# Altium PCB PCB1.PcbDoc (part 2 of 2)
Units mil, origin at the board's own origin, x right, y up, seen from the top; angles counter-clockwise.
Board outline 6000 x 4000 mil, 2 copper layers (Top Layer, Bottom Layer); 176 components, 0 nets, 932 pads, 76 vias.
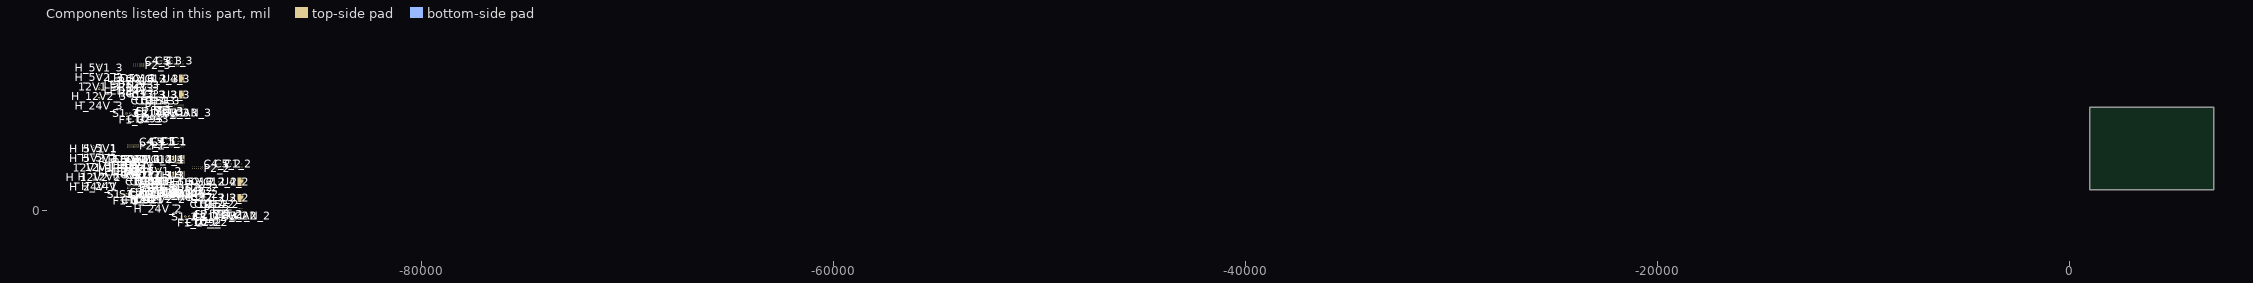
[diagram p2: the components of this part, seen from the top]

## Via types
v1: diameter 60, hole 35.43, Top Layer to Bottom Layer, 68 vias
v2: diameter 60, hole 28, Top Layer to Bottom Layer, 4 vias
v3: diameter 50, hole 28, Top Layer to Bottom Layer, 4 vias

## Nets (pads, with @x,y where several pads share a name; then routed paths per layer and width w, separated by ;. In a path a pad name is that pad's centre, name@x,y a point inside that pad or via, vN(x,y) a via of type N, cw(c..) or ccw(c..) an arc to the next point about the centre after c; other vN are vias at no path point) (continued)
copper on no net: | length 466920.3
  Top Layer w20: v1(-92504,3457.5) -92504,3250.33 -92484.47,3230.8 -92484.47,3039.53 -92544,2980 -92544,2800.82 -92509,2765.82 -92454.82,2765.82 v2(-92449,2760) -91606.43,2760 -91494,2647.57 -91494,740 -91599,635 -91877.28,635 -91889,646.72 -91889,707.76 ; v1(-92454,2860) -91664,2860 -91459,2655 -91459,730 -91584,605 -91999,605 -92039,645 -92039,707.76 ; v1(-92229,7382.5) -92229,7175.33 -92209.47,7155.8 -92209.47,6964.53 -92269,6905 -92269,6725.82 -92234,6690.82 -92179.82,6690.82 v2(-92174,6685) -91331.43,6685 -91219,6572.57 -91219,4665 -91324,4560 -91602.28,4560 -91614,4571.72 -91614,4632.76 ; v1(-92214,3467.5) -92214,3260.33 -92194.47,3240.8 -92194.47,3049.53 -92254,2990 -92254,2810.82 -92219,2775.82 -92164.82,2775.82 v2(-92159,2770) -91316.43,2770 -91204,2657.57 -91204,750 -91309,645 -91587.28,645 -91599,656.72 -91599,717.76 ; v1(-92179,6785) -91389,6785 -91184,6580 -91184,4655 -91309,4530 -91724,4530 -91764,4570 -91764,4632.76 ; v1(-92164,2870) -91374,2870 -91169,2665 -91169,740 -91294,615 -91709,615 -91749,655 -91749,717.76 ; -91989,926.69 -91989,988.5 -91962.5,1015 -91865.76,1015 -91756.61,905.85 -91756.61,865.85 -91742.99,852.23 -91741.39,852.23 -91737.51,856.11 -91617.89,856.11 -91614,860 ; -91939,902.24 -91939,973.28 -91927.28,985 -91878.19,985 -91844,950.81 -91844,810 -91811.43,777.43 -91741.39,777.43 -91732.68,768.71 -91622.71,768.71 -91614,760 -91636.57,737.43 ; -91714,4851.69 -91714,4913.5 -91687.5,4940 -91590.76,4940 -91481.61,4830.85 -91481.61,4790.85 -91467.99,4777.23 -91466.39,4777.23 -91462.51,4781.11 -91342.89,4781.11 -91339,4785 ; -91699,936.69 -91699,998.5 -91672.5,1025 -91575.76,1025 -91466.61,915.85 -91466.61,875.85 -91452.99,862.23 -91451.39,862.23 -91447.51,866.11 -91327.89,866.11 -91324,870 ; -91664,4827.24 -91664,4898.28 -91652.28,4910 -91603.19,4910 -91569,4875.81 -91569,4735 -91536.43,4702.43 -91466.39,4702.43 -91457.68,4693.71 -91347.71,4693.71 -91339,4685 -91361.57,4662.43 ; -91649,912.24 -91649,983.28 -91637.28,995 -91588.19,995 -91554,960.81 -91554,820 -91521.43,787.43 -91451.39,787.43 -91442.68,778.71 -91332.71,778.71 -91324,770 -91346.57,747.43 ; v1(-89369,2372.5) -89369,2165.33 -89349.47,2145.8 -89349.47,1954.53 -89409,1895 -89409,1715.82 -89374,1680.82 -89319.82,1680.82 v2(-89314,1675) -88471.43,1675 -88359,1562.57 -88359,-345 -88464,-450 -88742.28,-450 -88754,-438.28 -88754,-377.24 ; v1(-89319,1775) -88529,1775 -88324,1570 -88324,-355 -88449,-480 -88864,-480 -88904,-440 -88904,-377.24 ; -88854,-158.31 -88854,-96.5 -88827.5,-70 -88730.76,-70 -88621.61,-179.15 -88621.61,-219.15 -88607.99,-232.77 -88606.39,-232.77 -88602.51,-228.89 -88482.89,-228.89 -88479,-225 ; -88804,-182.76 -88804,-111.72 -88792.28,-100 -88743.19,-100 -88709,-134.19 -88709,-275 -88676.43,-307.57 -88606.39,-307.57 -88597.68,-316.29 -88487.71,-316.29 -88479,-325 -88501.57,-347.57
  Top Layer w25: v1(-94359,295) -95544,295 -96144,895 -96144,2990 -95894,3240 -95189,3240 -94869,2920 -92808.64,2920 -92749,2860.36 -92749,2764.29 -92749,2466 -92750,2465 ; -94322.23,1732.61 -94322.23,1799.27 -94296.5,1825 -94294,1825 ; -94294,1915 -94589.36,1915 -94604,1929.64 -94604,2565 -94346.5,2822.5 -94219,2822.5 ; -94289,2430 -94276.5,2417.5 -94258.64,2417.5 -94244,2402.86 -94244,2335.17 -94251.77,2327.39 ; -94285,2192.5 -94283.75,2191.25 -93996.27,2191.25 -93995.02,2190 ; -94284,2120 -94281.5,2120 -94254,2092.5 -94254,2024.62 ; v1(-94084,4220) -95269,4220 -95869,4820 -95869,6915 -95619,7165 -94914,7165 -94594,6845 -92533.64,6845 -92474,6785.36 -92474,6689.29 -92474,6391 -92475,6390 ; v1(-94069,305) -95254,305 -95854,905 -95854,3000 -95604,3250 -94899,3250 -94579,2930 -92518.64,2930 -92459,2870.36 -92459,2774.29 -92459,2476 -92460,2475 ; -94047.23,5657.61 -94047.23,5724.27 -94021.5,5750 -94019,5750 ; -94032.23,1742.61 -94032.23,1809.27 -94006.5,1835 -94004,1835 ; -94019,5840 -94314.36,5840 -94329,5854.64 -94329,6490 -94071.5,6747.5 -93944,6747.5 ; -94014,1711 -94010,1715 ; -94014,6355 -94001.5,6342.5 -93983.64,6342.5 -93969,6327.86 -93969,6260.17 -93976.77,6252.39 ; -94010,6117.5 -94008.75,6116.25 -93721.27,6116.25 -93720.02,6115 ; -94009,6045 -94006.5,6045 -93979,6017.5 -93979,5949.62 ; -94004,1925 -94299.36,1925 -94314,1939.64 -94314,2575 -94056.5,2832.5 v1@-93929,2832.5 ; -93999,2440 -93986.5,2427.5 -93968.64,2427.5 -93954,2412.86 -93954,2345.17 -93961.77,2337.39 ; -93995,2202.5 -93993.75,2201.25 -93706.27,2201.25 -93705.02,2200 ; -93994,2130 -93991.5,2130 -93964,2102.5 -93964,2034.62 ; -93990.02,2005 -93995.02,2010 -93995.02,2075 ; v1(-93946.5,2822.5) -93889,2765 -93889,2280.27 -93979.27,2190 -93995.02,2190 ; -93829.98,2005 -93830.04,2004.94 -93830.04,1752.63 -93810,1732.59 -93810,1715 -93808.66,1713.66 -93808.66,1619.66 -93749,1560 -93549,1560 -93439,1670 -93439,1820.36 -93424.36,1835 -93079,1835 -92881.5,2032.5 -92518.64,2032.5 -92504,2017.86 -92504,1764.64 -92489.36,1750 -92360,1750 ; -93810,2455 -93810,2436.06 -93834.98,2411.07 -93834.98,2190 -92894,2190 -92554,2530 -92360,2530 ; -93739,5636 -93735,5640 ; -93724,1721 -93720,1725 ; -93715.02,5930 -93720.02,5935 -93720.02,6000 ; -93700.02,2015 -93705.02,2020 -93705.02,2085 ; v1(-93671.5,6747.5) -93614,6690 -93614,6205.27 -93704.27,6115 -93720.02,6115 ; v1(-93656.5,2832.5) -93599,2775 -93599,2290.27 -93689.27,2200 -93705.02,2200 ; -93554.98,5930 -93555.04,5929.94 -93555.04,5677.63 -93535,5657.59 -93535,5640 -93533.66,5638.66 -93533.66,5544.66 -93474,5485 -93274,5485 -93164,5595 -93164,5745.36 -93149.36,5760 -92804,5760 -92606.5,5957.5 -92243.64,5957.5 -92229,5942.86 -92229,5689.64 -92214.36,5675 -92085,5675 ; -93539.98,2015 -93540.04,2014.94 -93540.04,1762.63 -93520,1742.59 -93520,1725 -93518.66,1723.66 -93518.66,1629.66 -93459,1570 -93259,1570 -93149,1680 -93149,1830.36 -93134.36,1845 -92789,1845 -92591.5,2042.5 -92228.64,2042.5 -92214,2027.86 -92214,1774.64 -92199.36,1760 -92070,1760 ; -93536.01,1690 -93536.01,1825.52 -93785.49,2075 -93995.02,2075 ; -93535,6380 -93535,6361.06 -93559.98,6336.07 -93559.98,6115 -92619,6115 -92279,6455 -92085,6455 ; -93533.51,2465 -93408.51,2590 -93059.39,2590 -92950,2480.61 -92950,2465 ; -93520,2465 -93520,2446.06 -93544.98,2421.07 -93544.98,2200 -92604,2200 -92264,2540 -92070,2540 ; -93333.51,2465 -93333.51,2364.51 -93284,2315 -92900,2315 -92750,2465 ; -93261.01,5615 -93261.01,5750.52 -93510.49,6000 -93720.02,6000 ; -93258.51,6390 -93133.51,6515 -92784.39,6515 -92675,6405.61 -92675,6390 ; -93257.77,1385.13 -93257.77,1381.2 -93244.15,1367.57 -93240.21,1367.57 -93142.64,1270 -92760.72,1270 -92749,1281.72 -92749,1383.91 -92737.91,1395 -92339,1395 -92179,1555 -92179,1885 ; -93246.01,1700 -93246.01,1835.52 -93495.49,2085 -93705.02,2085 ; -93243.51,2475 -93118.51,2600 -92769.39,2600 -92660,2490.61 -92660,2475 ; -93058.51,6390 -93058.51,6289.51 -93009,6240 -92625,6240 -92475,6390 ; -93043.51,2475 -93043.51,2374.51 -92994,2325 -92610,2325 -92460,2475 ; -92989.12,1680.88 -93052.57,1617.43 -93052.57,1385.13 -93052.57,1330.04 -93037.54,1315 -92843.64,1315 -92829,1329.64 -92829,1378.71 -92822.57,1385.13 ; -92982.77,5310.13 -92982.77,5306.2 -92969.15,5292.57 -92965.21,5292.57 -92867.64,5195 -92485.72,5195 -92474,5206.72 -92474,5308.91 -92462.91,5320 -92064,5320 -91904,5480 -91904,5810 ; -92980,1690 -92980,1869 -92851.5,1997.5 -92558.64,1997.5 -92544,1982.86 -92544,1699.64 -92529.36,1685 -92365,1685 -92360,1680 -92319.69,1680 -92294.82,1655.14 -92293.63,1655.14 -92264,1625.5 -92264,1555 -92278.64,1540.36 -92359.64,1540.36 -92360,1540 ; -92967.77,1395.13 -92967.77,1391.2 -92954.15,1377.57 -92950.21,1377.57 -92852.64,1280 -92470.72,1280 -92459,1291.72 -92459,1393.91 -92447.91,1405 -92049,1405 -91889,1565 -91889,1895 ; -92714.12,5605.88 -92777.57,5542.43 -92777.57,5310.13 -92777.57,5255.04 -92762.54,5240 -92568.64,5240 -92554,5254.64 -92554,5303.71 -92547.57,5310.13 ; -92705,5615 -92705,5794 -92576.5,5922.5 -92283.64,5922.5 -92269,5907.86 -92269,5624.64 -92254.36,5610 -92090,5610 -92085,5605 -92044.69,5605 -92019.82,5580.14 -92018.63,5580.14 -91989,5550.5 -91989,5480 -92003.64,5465.36 -92084.64,5465.36 -92085,5465 ; -92699.12,1690.88 -92762.57,1627.43 -92762.57,1395.13 -92762.57,1340.04 -92747.54,1325 -92553.64,1325 -92539,1339.64 -92539,1388.71 -92532.57,1395.13 ; -92690,1700 -92690,1879 -92561.5,2007.5 -92268.64,2007.5 -92254,1992.86 -92254,1709.64 -92239.36,1695 -92075,1695 -92070,1690 -92029.69,1690 -92004.82,1665.14 -92003.63,1665.14 -91974,1635.5 -91974,1565 -91988.64,1550.36 -92069.64,1550.36 -92070,1550 ; -92360,1820 -92244,1820 -92179,1885 ; -92360,2320 -92274,2320 -92234,2360 -92234,2415 -92271.81,2452.81 -92352.81,2452.81 -92360,2460 ; -92123.87,777.77 -92121.64,780 -91954.33,780 -91939.69,765.36 -91939.69,708.45 -91939,707.76 ; -92123.87,852.57 -92119.59,856.85 -92058.81,856.85 -92039,876.65 -92039,902.24 ; -92085,5745 -91969,5745 -91904,5810 ; -92085,6245 -91999,6245 -91959,6285 -91959,6340 -91996.81,6377.81 -92077.81,6377.81 -92085,6385 ; -92070,1830 -91954,1830 -91889,1895 ; -92070,2330 -91984,2330 -91944,2370 -91944,2425 -91981.81,2462.81 -92062.81,2462.81 -92070,2470 ; -91848.87,4702.77 -91846.64,4705 -91679.33,4705 -91664.69,4690.36 -91664.69,4633.44 -91664,4632.76 ; -91848.87,4777.57 -91844.59,4781.85 -91783.81,4781.85 -91764,4801.65 -91764,4827.24 ; -91833.87,787.77 -91831.64,790 -91664.33,790 -91649.69,775.36 -91649.69,718.45 -91649,717.76 ; -91833.87,862.57 -91829.59,866.85 -91768.81,866.85 -91749,886.65 -91749,912.24 ; v1(-91224,-790) -92409,-790 -93009,-190 -93009,1905 -92759,2155 -92054,2155 -91734,1835 -89673.64,1835 -89614,1775.36 -89614,1679.29 -89614,1381 -89615,1380 ; -91187.23,647.61 -91187.23,714.27 -91161.5,740 -91159,740 ; -91159,830 -91454.36,830 -91469,844.64 -91469,1480 -91211.5,1737.5 -91084,1737.5 ; -91154,1345 -91141.5,1332.5 -91123.64,1332.5 -91109,1317.86 -91109,1250.17 -91116.77,1242.39 ; -91150,1107.5 -91148.75,1106.25 -90861.27,1106.25 -90860.02,1105 ; -91149,1035 -91146.5,1035 -91119,1007.5 -91119,939.62 ; -90879,626 -90875,630 ; -90855.02,920 -90860.02,925 -90860.02,990 ; v1(-90811.5,1737.5) -90754,1680 -90754,1195.27 -90844.27,1105 -90860.02,1105 ; -90694.98,920 -90695.04,919.94 -90695.04,667.63 -90675,647.59 -90675,630 -90673.66,628.66 -90673.66,534.66 -90614,475 -90414,475 -90304,585 -90304,735.36 -90289.36,750 -89944,750 -89746.5,947.5 -89383.64,947.5 -89369,932.86 -89369,679.64 -89354.36,665 -89225,665 ; -90675,1370 -90675,1351.06 -90699.98,1326.07 -90699.98,1105 -89759,1105 -89419,1445 -89225,1445 ; -90401.01,605 -90401.01,740.52 -90650.49,990 -90860.02,990 ; -90398.51,1380 -90273.51,1505 -89924.39,1505 -89815,1395.61 -89815,1380 ; -90198.51,1380 -90198.51,1279.51 -90149,1230 -89765,1230 -89615,1380 ; -90122.77,300.13 -90122.77,296.2 -90109.15,282.57 -90105.21,282.57 -90007.64,185 -89625.72,185 -89614,196.72 -89614,298.91 -89602.91,310 -89204,310 -89044,470 -89044,800 ; -89854.12,595.88 -89917.57,532.43 -89917.57,300.13 -89917.57,245.04 -89902.54,230 -89708.64,230 -89694,244.64 -89694,293.71 -89687.57,300.13 ; -89845,605 -89845,784 -89716.5,912.5 -89423.64,912.5 -89409,897.86 -89409,614.64 -89394.36,600 -89230,600 -89225,595 -89184.69,595 -89159.82,570.14 -89158.63,570.14 -89129,540.5 -89129,470 -89143.64,455.36 -89224.64,455.36 -89225,455 ; -89225,735 -89109,735 -89044,800 ; -89225,1235 -89139,1235 -89099,1275 -89099,1330 -89136.81,1367.81 -89217.81,1367.81 -89225,1375 ; -88988.87,-307.23 -88986.64,-305 -88819.33,-305 -88804.69,-319.64 -88804.69,-376.56 -88804,-377.24 ; -88988.87,-232.43 -88984.59,-228.15 -88923.81,-228.15 -88904,-208.35 -88904,-182.76 ; -93995.02,2075 -93995.02,2190 ; -93720.02,6000 -93720.02,6115 ; -93705.02,2085 -93705.02,2200 ; -92750,2465 -92615,2600 -92360,2600 -92229,2600 -92179,2550 -92179,1885 ; -92475,6390 -92340,6525 -92085,6525 -91954,6525 -91904,6475 -91904,5810 ; -92460,2475 -92325,2610 -92070,2610 -91939,2610 -91889,2560 -91889,1895 ; -90860.02,990 -90860.02,1105 ; -89615,1380 -89480,1515 -89225,1515 -89094,1515 -89044,1465 -89044,800
  Top Layer w35: v1(-95294,2790) -95884,2790 -96084,2590 -96084,955 -95744,615 v1(-95379,615) v1(-92789,615) -92290.57,615 -92133.93,771.65 -92129.99,771.65 -92123.87,777.77 ; v1(-95019,6715) -95609,6715 -95809,6515 -95809,4880 -95469,4540 v1(-95104,4540) v1(-92514,4540) -92015.57,4540 -91858.93,4696.65 -91854.99,4696.65 -91848.87,4702.77 ; v1(-95004,2800) -95594,2800 -95794,2600 -95794,965 -95454,625 v1(-95089,625) v1(-92499,625) -92000.57,625 -91843.93,781.65 -91839.99,781.65 -91833.87,787.77 ; v1(-94409,2605) -94409,2413.76 -94332.7,2337.45 -94332.7,2333.52 -94326.57,2327.39 ; -94289,2520 -94286.5,2520 -94279,2527.5 -94279,2530 -94109,2700 -94109,2822.5 ; -94247.43,1732.61 -94247.43,1640.21 -94404,1483.64 -94404,1016.36 -94067.64,680 v1(-93919,680) ; -94219,2822.5 -94109,2822.5 ; v1(-94134,6530) -94134,6338.76 -94057.7,6262.45 -94057.7,6258.52 -94051.57,6252.39 ; v1(-94119,2615) -94119,2423.76 -94042.7,2347.45 -94042.7,2343.52 -94036.57,2337.39 ; -94014,1711 -94007,1704 -94007,1508 v1(-94004,1505) ; -94014,6445 -94011.5,6445 -94004,6452.5 -94004,6455 -93834,6625 -93834,6747.5 ; v1(-94004,2755) -94007,2752 -94007,2372 -94109,2270 -94343.5,2270 -94364,2249.5 -94364,2108.61 -94327.7,2072.31 -94327.7,2039.58 -94297.89,2009.78 -94297.89,1998.44 -94267.04,1967.59 -94241.2,1967.59 -94159,1885.39 -94159,1390 ; -93999,2530 -93996.5,2530 -93989,2537.5 -93989,2540 -93819,2710 -93819,2832.5 ; -93972.43,5657.61 -93972.43,5565.21 -94129,5408.64 -94129,4941.36 -93792.64,4605 v1(-93644,4605) ; -93957.43,1742.61 -93957.43,1650.21 -94114,1493.64 -94114,1026.36 -93777.64,690 v1(-93629,690) ; v1(-93946.5,2822.5) -94109,2822.5 ; -93944,6747.5 -93834,6747.5 ; v1@-93929,2832.5 -93819,2832.5 ; v1(-93824,765) -94074,765 -94339,1030 -94339,1369.5 -94318.5,1390 -94159,1390 ; -93739,5636 -93732,5629 -93732,5433 v1(-93729,5430) ; v1(-93729,6680) -93732,6677 -93732,6297 -93834,6195 -94068.5,6195 -94089,6174.5 -94089,6033.61 -94052.7,5997.31 -94052.7,5964.58 -94022.89,5934.78 -94022.89,5923.44 -93992.04,5892.59 -93966.2,5892.59 -93884,5810.39 -93884,5315 ; -93724,1721 -93717,1714 -93717,1518 v1(-93714,1515) ; v1(-93714,2765) -93717,2762 -93717,2382 -93819,2280 -94053.5,2280 -94074,2259.5 -94074,2118.61 -94037.7,2082.31 -94037.7,2049.58 -94007.89,2019.78 -94007.89,2008.44 -93977.04,1977.59 -93951.2,1977.59 -93869,1895.39 -93869,1400 ; v1(-93671.5,6747.5) -93834,6747.5 ; v1(-93656.5,2832.5) -93819,2832.5 ; v1(-93549,4690) -93799,4690 -94064,4955 -94064,5294.5 -94043.5,5315 -93884,5315 ; -93536.01,1825.52 -93536.01,1827.99 -93474,1890 -93109,1890 -92539,2460 -92360,2460 ; v1(-93534,775) -93784,775 -94049,1040 -94049,1379.5 -94028.5,1400 -93869,1400 ; -93481.43,1384.87 -93481.29,1385 -93332.71,1385 -93332.57,1385.13 -93326.45,1391.26 -93326.45,1467.55 -93113.12,1680.88 -92989.12,1680.88 -92980,1690 ; -93336.01,1690 -93556.23,1469.78 -93556.23,1384.87 -93561.36,1390 -94159,1390 ; -93261.01,5750.52 -93261.01,5752.99 -93199,5815 -92834,5815 -92264,6385 -92085,6385 ; -93246.01,1835.52 -93246.01,1837.99 -93184,1900 -92819,1900 -92249,2470 -92070,2470 ; -93206.43,5309.87 -93206.29,5310 -93057.71,5310 -93057.57,5310.13 -93051.45,5316.26 -93051.45,5392.55 -92838.12,5605.88 -92714.12,5605.88 -92705,5615 ; -93191.43,1394.87 -93191.29,1395 -93042.71,1395 -93042.57,1395.13 -93036.45,1401.26 -93036.45,1477.55 -92823.12,1690.88 -92699.12,1690.88 -92690,1700 ; -93061.01,5615 -93281.23,5394.78 -93281.23,5309.87 -93286.36,5315 -93884,5315 ; -93046.01,1700 -93266.23,1479.78 -93266.23,1394.87 -93271.36,1400 -93869,1400 ; -92977.77,1385.13 -92971.65,1391.26 -92971.65,1397.35 -92780,1589 -92780,1690 -92763.54,1706.46 -92763.54,1760.46 v1(-92604,1920) ; v3(-92816.01,3462.5) -92816.01,3462.99 -92761.5,3517.5 -91851.5,3517.5 -91394,3060 -91394,565 -91554,405 -92444,405 v1(-92544,505) ; -92702.77,5310.13 -92696.65,5316.26 -92696.65,5322.35 -92505,5514 -92505,5615 -92488.54,5631.46 -92488.54,5685.46 v1(-92329,5845) ; -92687.77,1395.13 -92681.65,1401.26 -92681.65,1407.35 -92490,1599 -92490,1700 -92473.54,1716.46 -92473.54,1770.46 v1(-92314,1930) ; v1(-92674,2125) -92669.22,2129.78 -92669.22,2194.78 -92474,2390 -92360,2390 ; v1@-92604,1911.14 -92604,1695 -92519,1610 -92360,1610 ; v1(-92549,720) -92304,720 -92175.36,848.64 -92127.8,848.64 -92123.87,852.57 ; v3(-92541.01,7387.5) -92541.01,7387.99 -92486.5,7442.5 -91576.5,7442.5 -91119,6985 -91119,4490 -91279,4330 -92169,4330 v1(-92269,4430) ; v3(-92526.01,3472.5) -92526.01,3472.99 -92471.5,3527.5 -91561.5,3527.5 -91104,3070 -91104,575 -91264,415 -92154,415 v1(-92254,515) ; v1(-92399,6050) -92394.22,6054.78 -92394.22,6119.78 -92199,6315 -92085,6315 ; v1(-92384,2135) -92379.22,2139.78 -92379.22,2204.78 -92184,2400 -92070,2400 ; v1@-92329,5836.14 -92329,5620 -92244,5535 -92085,5535 ; v1@-92314,1921.14 -92314,1705 -92229,1620 -92070,1620 ; v1(-92274,4645) -92029,4645 -91900.36,4773.64 -91852.8,4773.64 -91848.87,4777.57 ; v1(-92259,730) -92014,730 -91885.36,858.64 -91837.8,858.64 -91833.87,862.57 ; v1(-92159,1705) -92749,1705 -92949,1505 -92949,-130 -92609,-470 v1(-92244,-470) v1(-89654,-470) -89155.57,-470 -88998.93,-313.35 -88994.99,-313.35 -88988.87,-307.23 ; -91900,1685 -91900,1744.06 ; -91900,2465 -91900,1744.06 ; v1(-91644,2150) -91641.13,2147.13 -91641.13,2073.07 -91640.67,2072.61 -91640.67,2003.38 -91900,1744.06 ; -91625,5610 -91625,5669.06 ; -91625,6390 -91625,5669.06 ; -91610,1695 -91610,1754.06 ; -91610,2475 -91610,1754.06 ; v1(-91369,6075) -91366.13,6072.13 -91366.13,5998.07 -91365.67,5997.61 -91365.67,5928.38 -91625,5669.06 ; v1(-91354,2160) -91351.13,2157.13 -91351.13,2083.07 -91350.67,2082.61 -91350.67,2013.38 -91610,1754.06 ; v1(-91274,1520) -91274,1328.76 -91197.7,1252.45 -91197.7,1248.52 -91191.57,1242.39 ; -91154,1435 -91151.5,1435 -91144,1442.5 -91144,1445 -90974,1615 -90974,1737.5 ; -91112.43,647.61 -91112.43,555.21 -91269,398.64 -91269,-68.64 -90932.64,-405 v1(-90784,-405) ; -91084,1737.5 -90974,1737.5 ; -90879,626 -90872,619 -90872,423 v1(-90869,420) ; v1(-90869,1670) -90872,1667 -90872,1287 -90974,1185 -91208.5,1185 -91229,1164.5 -91229,1023.61 -91192.7,987.31 -91192.7,954.58 -91162.89,924.78 -91162.89,913.44 -91132.04,882.59 -91106.2,882.59 -91024,800.39 -91024,305 ; v1(-90811.5,1737.5) -90974,1737.5 ; v1(-90689,-320) -90939,-320 -91204,-55 -91204,284.5 -91183.5,305 -91024,305 ; -90401.01,740.52 -90401.01,742.99 -90339,805 -89974,805 -89404,1375 -89225,1375 ; -90346.43,299.87 -90346.29,300 -90197.71,300 -90197.57,300.13 -90191.45,306.26 -90191.45,382.55 -89978.12,595.88 -89854.12,595.88 -89845,605 ; -90201.01,605 -90421.23,384.78 -90421.23,299.87 -90426.36,305 -91024,305 ; -89842.77,300.13 -89836.65,306.26 -89836.65,312.35 -89645,504 -89645,605 -89628.54,621.46 -89628.54,675.46 v1(-89469,835) ; v3(-89681.01,2377.5) -89681.01,2377.99 -89626.5,2432.5 -88716.5,2432.5 -88259,1975 -88259,-520 -88419,-680 -89309,-680 v1(-89409,-580) ; v1(-89539,1040) -89534.22,1044.78 -89534.22,1109.78 -89339,1305 -89225,1305 ; v1@-89469,826.14 -89469,610 -89384,525 -89225,525 ; v1(-89414,-365) -89169,-365 -89040.36,-236.36 -88992.8,-236.36 -88988.87,-232.43 ; -88765,600 -88765,659.06 ; -88765,1380 -88765,659.06 ; v1(-88509,1065) -88506.13,1062.13 -88506.13,988.07 -88505.67,987.61 -88505.67,918.38 -88765,659.06
  Bottom Layer w20: -93734,1070 -93723.43,1070 -93708.84,1055.41 -93704.41,1055.41 -93529,880 ; -93734,1170 -93659,1245 -93509,1245 -93484,1220 -93484,935 -93429,880 ; -93698.87,542.23 -93571.77,542.23 -93555,559 -93555,611.3 ; -93605,611.3 -93605,640.29 -93591.23,654.06 -93591.23,755.13 ; v1@-93516.43,755.13 -93516.43,651.72 -93505,640.29 -93505,611.3 ; -93459,4995 -93448.43,4995 -93433.84,4980.41 -93429.41,4980.41 -93254,4805 ; -93459,5095 -93384,5170 -93234,5170 -93209,5145 -93209,4860 -93154,4805 ; -93455,611.3 -93455,582.76 -93340.02,467.77 -93144.13,467.77 ; -93444,1080 -93433.43,1080 -93418.84,1065.41 -93414.41,1065.41 -93239,890 ; -93444,1180 -93369,1255 -93219,1255 -93194,1230 -93194,945 -93139,890 ; -93423.87,4467.23 -93296.77,4467.23 -93280,4484 -93280,4536.3 ; -93408.87,552.23 -93281.77,552.23 -93265,569 -93265,621.3 ; -93405,398.7 -93404.46,398.16 -93404.46,369.62 -93322.34,287.5 -91841.5,287.5 -91499,630 -91499,3255 -91734,3490 -91889,3490 -92049,3330 -91984.47,3265.47 -91984.47,3120.47 -91934,3070 ; -93405,611.3 -93405,582.76 -93364.82,542.57 -93144.13,542.57 ; -93355,398.7 -93355,370.16 -93304.84,320 -91884,320 -91534,670 -91534,3225 -91764,3455 -91864,3455 -91946.63,3372.37 -91946.63,3332.37 -91949,3330 -91949,3319.22 -91934,3304.22 -91934,3170 ; -93355,611.3 -93355,680.67 -93320.39,715.28 -93320.39,741.24 -93306.77,754.87 ; -93330,4536.3 -93330,4565.29 -93316.23,4579.06 -93316.23,4680.13 ; -93315,621.3 -93315,650.29 -93301.23,664.06 -93301.23,765.13 ; -93305,611.3 -93305,669 -93094,880 ; -93255,611.3 -93255,674 -93172.73,756.27 -93047.73,756.27 -92994,810 -92994,880 ; -93241.43,4680.13 -93241.43,4576.72 -93230,4565.29 -93230,4536.3 ; -93226.43,765.13 -93226.43,661.72 -93215,650.29 -93215,621.3 ; -93180,4536.3 -93180,4507.76 -93065.02,4392.77 -92869.13,4392.77 ; -93165,621.3 -93165,592.76 -93050.02,477.77 -92854.13,477.77 ; -93159,3330 -93159,3246.62 -93183.53,3222.09 -93183.53,3119.53 -93134,3070 ; -93134,3170 -93126.5,3170 -92966.5,3330 -92959,3330 ; -93130,4323.7 -93129.46,4323.16 -93129.46,4294.62 -93047.34,4212.5 -91566.5,4212.5 -91224,4555 -91224,7180 -91459,7415 -91614,7415 -91774,7255 -91709.47,7190.47 -91709.47,7045.47 -91659,6995 ; -93130,4536.3 -93130,4507.76 -93089.82,4467.57 -92869.13,4467.57 ; -93115,408.7 -93114.46,408.16 -93114.46,379.62 -93032.34,297.5 -91551.5,297.5 -91209,640 -91209,3265 -91444,3500 -91599,3500 -91759,3340 -91694.47,3275.47 -91694.47,3130.47 -91644,3080 ; -93115,621.3 -93115,592.76 -93074.82,552.57 -92854.13,552.57 ; -93080,4323.7 -93080,4295.16 -93029.84,4245 -91609,4245 -91259,4595 -91259,7150 -91489,7380 -91589,7380 -91671.63,7297.37 -91671.63,7257.37 -91674,7255 -91674,7244.22 -91659,7229.22 -91659,7095 ; -93080,4536.3 -93080,4605.67 -93045.39,4640.28 -93045.39,4666.24 -93031.77,4679.87 ; -93065,408.7 -93065,380.16 -93014.84,330 -91594,330 -91244,680 -91244,3235 -91474,3465 -91574,3465 -91656.63,3382.37 -91656.63,3342.37 -91659,3340 -91659,3329.22 -91644,3314.22 -91644,3180 ; -93065,621.3 -93065,690.67 -93030.39,725.28 -93030.39,751.24 -93016.77,764.87 ; -93034,3070 -93034,2795 -92949,2710 -92428.29,2710 -92383.53,2754.76 -92383.53,3293.84 -92354.01,3323.36 -92354.01,3330 ; -93030,4536.3 -93030,4594 -92819,4805 ; -93015,621.3 -93015,679 -92804,890 ; -92980,4536.3 -92980,4599 -92897.73,4681.27 -92772.73,4681.27 -92719,4735 -92719,4805 ; -92965,621.3 -92965,684 -92882.73,766.27 -92757.73,766.27 -92704,820 -92704,890 ; -92884,7255 -92884,7171.62 -92908.53,7147.09 -92908.53,7044.53 -92859,6995 ; -92869,3340 -92869,3256.62 -92893.53,3232.09 -92893.53,3129.53 -92844,3080 ; -92859,7095 -92851.5,7095 -92691.5,7255 -92684,7255 ; -92844,3180 -92836.5,3180 -92676.5,3340 -92669,3340 ; -92759,6995 -92759,6720 -92674,6635 -92153.29,6635 -92108.53,6679.76 -92108.53,7218.84 -92079.01,7248.36 -92079.01,7255 ; -92744,3080 -92744,2805 -92659,2720 -92138.29,2720 -92093.53,2764.76 -92093.53,3303.84 -92064.01,3333.36 -92064.01,3340 ; -92634,1170 -92583.53,1119.53 -92583.53,1049.48 -92463.96,929.92 -92397.25,929.92 -92385.54,918.21 -92385.54,886.54 -92379,880 ; -92634,3070 -92634,2905 -92589,2860 v1(-92454,2860) ; -92534,1070 -92439.08,975.08 -92374.08,975.08 -92279,880 ; -92534,3170 -92534,3279.41 -92503.93,3309.48 -92503.93,3457.43 v1(-92504,3457.5) ; -92359,5095 -92308.53,5044.53 -92308.53,4974.48 -92188.96,4854.92 -92122.25,4854.92 -92110.54,4843.21 -92110.54,4811.54 -92104,4805 ; -92359,6995 -92359,6830 -92314,6785 v1(-92179,6785) ; -92344,1180 -92293.53,1129.53 -92293.53,1059.48 -92173.96,939.92 -92107.25,939.92 -92095.54,928.21 -92095.54,896.54 -92089,890 ; -92344,3080 -92344,2915 -92299,2870 v1(-92164,2870) ; -92259,4995 -92164.08,4900.08 -92099.08,4900.08 -92004,4805 ; -92259,7095 -92259,7204.41 -92228.93,7234.48 -92228.93,7382.43 v1(-92229,7382.5) ; -92244,1080 -92149.08,985.08 -92084.08,985.08 -91989,890 ; -92244,3180 -92244,3289.41 -92213.93,3319.48 -92213.93,3467.43 v1(-92214,3467.5) ; -90599,-15 -90588.43,-15 -90573.84,-29.59 -90569.41,-29.59 -90394,-205 ; -90599,85 -90524,160 -90374,160 -90349,135 -90349,-150 -90294,-205 ; -90563.87,-542.77 -90436.77,-542.77 -90420,-526 -90420,-473.7 ; -90470,-473.7 -90470,-444.71 -90456.23,-430.94 -90456.23,-329.87 ; -90381.43,-329.87 -90381.43,-433.28 -90370,-444.71 -90370,-473.7 ; -90320,-473.7 -90320,-502.24 -90205.02,-617.23 -90009.13,-617.23 ; -90270,-686.3 -90269.46,-686.84 -90269.46,-715.38 -90187.34,-797.5 -88706.5,-797.5 -88364,-455 -88364,2170 -88599,2405 -88754,2405 -88914,2245 -88849.47,2180.47 -88849.47,2035.47 -88799,1985 ; -90270,-473.7 -90270,-502.24 -90229.82,-542.43 -90009.13,-542.43 ; -90220,-686.3 -90220,-714.84 -90169.84,-765 -88749,-765 -88399,-415 -88399,2140 -88629,2370 -88729,2370 -88811.63,2287.37 -88811.63,2247.37 -88814,2245 -88814,2234.22 -88799,2219.22 -88799,2085 ; -90220,-473.7 -90220,-404.33 -90185.39,-369.72 -90185.39,-343.76 -90171.77,-330.13 ; -90170,-473.7 -90170,-416 -89959,-205 ; -90120,-473.7 -90120,-411 -90037.73,-328.73 -89912.73,-328.73 -89859,-275 -89859,-205 ; -90024,2245 -90024,2161.62 -90048.53,2137.09 -90048.53,2034.53 -89999,1985 ; -89999,2085 -89991.5,2085 -89831.5,2245 -89824,2245 ; -89899,1985 -89899,1710 -89814,1625 -89293.29,1625 -89248.53,1669.76 -89248.53,2208.84 -89219.01,2238.36 -89219.01,2245 ; -89499,85 -89448.53,34.53 -89448.53,-35.52 -89328.96,-155.08 -89262.25,-155.08 -89250.54,-166.79 -89250.54,-198.46 -89244,-205 ; -89499,1985 -89499,1820 -89454,1775 v1(-89319,1775) ; -89399,-15 -89304.08,-109.92 -89239.08,-109.92 -89144,-205 ; -89399,2085 -89399,2194.41 -89368.93,2224.48 -89368.93,2372.43 v1(-89369,2372.5)
  Bottom Layer w25: -94729,465 -94529,465 -94529,460 -94364,295 v1(-94359,295) ; -94454,4390 -94254,4390 -94254,4385 -94089,4220 v1(-94084,4220) ; -94439,475 -94239,475 -94239,470 -94074,305 v1(-94069,305) ; -93698.87,467.43 -93468.64,467.43 -93454,452.78 -93454,399.7 -93455,398.7 ; -93423.87,4392.43 -93193.64,4392.43 -93179,4377.78 -93179,4324.7 -93180,4323.7 ; -93408.87,477.43 -93178.64,477.43 -93164,462.78 -93164,409.7 -93165,408.7 ; -93134,1070 -93039.08,975.08 -92989.08,975.08 -92894,880 ; -93034,3170 -92954.08,3249.92 -92634.08,3249.92 -92554.01,3330 ; -92859,3330 -92654.01,3330 ; -92859,4995 -92764.08,4900.08 -92714.08,4900.08 -92619,4805 ; -92844,1080 -92749.08,985.08 -92699.08,985.08 -92604,890 ; -92759,7095 -92679.08,7174.92 -92359.08,7174.92 -92279.01,7255 ; -92744,3180 -92664.08,3259.92 -92344.08,3259.92 -92264.01,3340 ; -92584,7255 -92379.01,7255 ; -92569,3340 -92364.01,3340 ; v1@-92535.41,713.59 -92345.41,713.59 -92089,970 -91854,970 -91834,990 -91834,1070 ; v1@-92260.41,4638.59 -92070.41,4638.59 -91814,4895 -91579,4895 -91559,4915 -91559,4995 ; v1@-92245.41,723.59 -92055.41,723.59 -91799,980 -91564,980 -91544,1000 -91544,1080 ; -91849,3330 -91849,3320.57 -91834,3305.57 -91834,3170 ; -91594,-620 -91394,-620 -91394,-625 -91229,-790 v1(-91224,-790) ; -91574,7255 -91574,7245.57 -91559,7230.57 -91559,7095 ; -91559,3340 -91559,3330.57 -91544,3315.57 -91544,3180 ; -90563.87,-617.57 -90333.64,-617.57 -90319,-632.22 -90319,-685.3 -90320,-686.3 ; -89999,-15 -89904.08,-109.92 -89854.08,-109.92 -89759,-205 ; -89899,2085 -89819.08,2164.92 -89499.08,2164.92 -89419.01,2245 ; -89724,2245 -89519.01,2245 ; v1@-89400.41,-371.41 -89210.41,-371.41 -88954,-115 -88719,-115 -88699,-95 -88699,-15 ; -88714,2245 -88714,2235.57 -88699,2220.57 -88699,2085
  Bottom Layer w35: -96149,1745 -96149,2240 -96149,2830 -95894,3085 ; -96133.5,2240 -96016.25,2240 ; -95899,1708.75 -96112.75,1708.75 -96154,1750 -96154,1245 ; -95899,1967.5 -95739,1807.5 -95739,1668.75 -95862.75,1545 -95899,1508.75 -95895.25,1505 -94534,1505 ; -95899,2167.5 -95811.5,2167.5 -95739,2240 ; -95899,2480 -95604,2480 v1(-95294,2790) ; -95899,2626.25 -95919.29,2626.25 -95958.04,2587.5 -95991.5,2587.5 -96016.25,2562.75 -96016.25,2240 ; -95894,2885 -95389,2885 v1(-95294,2790) ; -95892.5,1050 -94349,1050 -94049,750 ; -95874,5670 -95874,6165 -95874,6755 -95619,7010 ; -95859,1755 -95859,2250 -95859,2840 -95604,3095 ; -95858.5,6165 -95741.25,6165 ; -95843.5,2250 -95726.25,2250 ; -95624,5633.75 -95837.75,5633.75 -95879,5675 -95879,5170 ; -95624,5892.5 -95464,5732.5 -95464,5593.75 -95587.75,5470 -95624,5433.75 -95620.25,5430 -94259,5430 ; -95624,6092.5 -95536.5,6092.5 -95464,6165 ; -95624,6405 -95329,6405 v1(-95019,6715) ; -95624,6551.25 -95644.29,6551.25 -95683.04,6512.5 -95716.5,6512.5 -95741.25,6487.75 -95741.25,6165 ; -95619,6810 -95114,6810 v1(-95019,6715) ; -95617.5,4975 -94074,4975 -93774,4675 ; -95609,1718.75 -95822.75,1718.75 -95864,1760 -95864,1255 ; -95609,1977.5 -95449,1817.5 -95449,1678.75 -95572.75,1555 -95609,1518.75 -95605.25,1515 -94244,1515 ; -95609,2177.5 -95521.5,2177.5 -95449,2250 ; -95609,2490 -95314,2490 v1(-95004,2800) ; -95609,2636.25 -95629.29,2636.25 -95668.04,2597.5 -95701.5,2597.5 -95726.25,2572.75 -95726.25,2250 ; -95604,2895 -95099,2895 v1(-95004,2800) ; -95602.5,1060 -94059,1060 -93759,760 ; v1(-95379,615) -95374.22,610.22 -95356.54,610.22 -95351.32,605 -94400.73,605 -94385.73,620 ; v1(-95104,4540) -95099.22,4535.22 -95081.54,4535.22 -95076.32,4530 -94125.73,4530 -94110.73,4545 ; v1(-95089,625) -95084.22,620.22 -95066.54,620.22 -95061.32,615 -94110.73,615 -94095.73,630 ; -94764.04,770 -96154,770 ; -94579,770 -94449,900 -94269,900 -94129,760 -94129,560 -94169,520 -94169,435.4 -94108.6,375 -93839,375 -93764,450 -93764,680 -93824,740 v1(-93824,765) ; -94489.04,4695 -95879,4695 ; -94474.04,780 -95864,780 ; v1(-94409,2605) -94534,2480 -94534,1505 ; -94393.96,770 -94385.73,761.77 -94385.73,620 ; -94304,4695 -94174,4825 -93994,4825 -93854,4685 -93854,4485 -93894,4445 -93894,4360.4 -93833.6,4300 -93564,4300 -93489,4375 -93489,4605 -93549,4665 v1(-93549,4690) ; -94289,780 -94159,910 -93979,910 -93839,770 -93839,570 -93879,530 -93879,445.4 -93818.6,385 -93549,385 -93474,460 -93474,690 -93534,750 v1(-93534,775) ; -94234,3170 -94234,3070 -94234,2865 ; -94134,1070 -94134,1170 ; -94134,3070 -94134,3170 -94134,3284.5 -94139.5,3290 -94794,3290 v1(-95294,2790) ; -94134,3280 -93999,3415 -93059,3415 ; v1(-94134,6530) -94259,6405 -94259,5430 ; v1(-94119,2615) -94244,2490 -94244,1515 ; -94118.96,4695 -94110.73,4686.77 -94110.73,4545 ; -94103.96,780 -94095.73,771.77 -94095.73,630 ; -94034,3070 -94034,3170 ; v1(-94004,2755) -93374,2125 v1(-92674,2125) ; -93959,7095 -93959,6995 -93959,6790 ; v1(-93946.5,2822.5) -94191.5,2822.5 -94234,2865 ; -93944,3180 -93944,3080 -93944,2875 ; v1(-93919,680) -93923.78,684.78 -93983.78,684.78 -94049,750 ; -93879,465 -94079,465 -94079,492.59 -94049,522.59 -94049,750 ; -93859,4995 -93859,5095 ; -93859,6995 -93859,7095 -93859,7209.5 -93864.5,7215 -94519,7215 v1(-95019,6715) ; -93859,7205 -93724,7340 -92784,7340 ; -93844,1080 -93844,1180 ; -93844,3080 -93844,3180 -93844,3294.5 -93849.5,3300 -94504,3300 v1(-95004,2800) ; -93844,3290 -93709,3425 -92769,3425 ; -93759,6995 -93759,7095 ; -93744,3080 -93744,3180 ; v1(-93729,6680) -93099,6050 v1(-92399,6050) ; v1(-93714,2765) -93084,2135 v1(-92384,2135) ; -93698.87,467.43 -93698.87,462.87 -93700.43,461.3 -93700.43,403.57 -93784,320 ; v1(-93671.5,6747.5) -93916.5,6747.5 -93959,6790 ; v1(-93656.5,2832.5) -93901.5,2832.5 -93944,2875 ; v1(-93644,4605) -93648.78,4609.78 -93708.78,4609.78 -93774,4675 ; v1(-93629,690) -93633.78,694.78 -93693.78,694.78 -93759,760 ; -93629,880 -93844,880 ; -93611.67,376.83 -93668.5,320 -93784,320 ; -93604,4390 -93804,4390 -93804,4417.59 -93774,4447.59 -93774,4675 ; -93589,475 -93789,475 -93789,502.59 -93759,532.59 -93759,760 ; -93555,398.7 -93555,321 -93544,310 ; -93505,398.7 -93505,349 -93544,310 ; -93423.87,4392.43 -93423.87,4387.87 -93425.43,4386.3 -93425.43,4328.57 -93509,4245 ; -93408.87,477.43 -93408.87,472.87 -93410.43,471.3 -93410.43,413.57 -93494,330 ; -93381.57,754.87 -93444.8,754.87 -93465.3,775.37 -93465.3,794.08 -93481.41,810.19 -93774.19,810.19 -93844,880 ; -93354,4805 -93569,4805 ; -93339,890 -93554,890 ; -93336.67,4301.83 -93393.5,4245 -93509,4245 ; -93321.67,386.83 -93378.5,330 -93494,330 ; -93280,4323.7 -93280,4246 -93269,4235 ; -93265,408.7 -93265,331 -93254,320 ; -93230,4323.7 -93230,4274 -93269,4235 ; -93215,408.7 -93215,359 -93254,320 ; -93106.57,4679.87 -93169.8,4679.87 -93190.3,4700.37 -93190.3,4719.08 -93206.41,4735.19 -93499.19,4735.19 -93569,4805 ; -93091.57,764.87 -93154.8,764.87 -93175.3,785.37 -93175.3,804.08 -93191.41,820.19 -93484.19,820.19 -93554,890 ; -93059,3330 -93059,3415 ; -93014,660 -93014,1155 -93014,1745 -92759,2000 ; -92998.5,1155 -92881.25,1155 ; -92980,1690 -92980,1702.9 -92958.8,1724.1 -92958.8,1731.51 -92697.82,1992.5 -92412.82,1992.5 -92367.82,1947.5 -91846.5,1947.5 v1(-91644,2150) -91644,2610 -91734,2700 ; -92950,2465 -92810,2605 -91829,2605 -91734,2700 ; -92894,880 -92892.28,880 -92834.86,937.42 -92537.69,937.42 -92480.27,880 -92479,880 -92479,790 v1(-92549,720) -92546.5,717.5 -92546.5,507.5 v1(-92544,505) ; -92859,3330 -92859,3415.45 -92816.01,3458.44 v3(-92816.01,3462.5) ; -92794,880 -92794,685.5 -92793.78,685.29 -92793.78,665.22 ; v1(-92789,615) -92793.78,619.78 -92793.78,665.22 ; -92784,7255 -92784,7340 ; -92769,3340 -92769,3425 ; v1@-92764,623.75 -92977.75,623.75 -93019,665 -93019,160 ; -92764,882.5 -92604,722.5 -92604,583.75 -92727.75,460 -92764,423.75 -92760.25,420 -91399,420 ; -92764,1082.5 -92676.5,1082.5 -92604,1155 ; -92764,1395 -92469,1395 v1(-92159,1705) ; -92764,1541.25 -92784.29,1541.25 -92823.04,1502.5 -92856.5,1502.5 -92881.25,1477.75 -92881.25,1155 ; -92759,1800 -92254,1800 v1(-92159,1705) ; -92757.5,-35 -91214,-35 -90914,-335 ; -92705,5615 -92705,5627.9 -92683.8,5649.1 -92683.8,5656.51 -92422.82,5917.5 -92137.82,5917.5 -92092.82,5872.5 -91571.5,5872.5 v1(-91369,6075) -91369,6535 -91459,6625 ; -92690,1700 -92690,1712.9 -92668.8,1734.1 -92668.8,1741.51 -92407.82,2002.5 -92122.82,2002.5 -92077.82,1957.5 -91556.5,1957.5 v1(-91354,2160) -91354,2620 -91444,2710 ; -92675,6390 -92535,6530 -91554,6530 -91459,6625 ; -92660,2475 -92520,2615 -91539,2615 -91444,2710 ; -92619,4805 -92617.28,4805 -92559.86,4862.42 -92262.69,4862.42 -92205.27,4805 -92204,4805 -92204,4715 v1(-92274,4645) -92271.5,4642.5 -92271.5,4432.5 v1(-92269,4430) ; -92604,890 -92602.28,890 -92544.86,947.42 -92247.69,947.42 -92190.27,890 -92189,890 -92189,800 v1(-92259,730) -92256.5,727.5 -92256.5,517.5 v1(-92254,515) ; v1(-92604,1920) -92604,1510 -92724,1390 -93983.5,1390 -94004,1410.5 v1(-94004,1505) -94534,1505 ; -92584,7255 -92584,7340.45 -92541.01,7383.44 v3(-92541.01,7387.5) ; -92579,880 -92793.78,665.22 ; -92569,3340 -92569,3425.45 -92526.01,3468.44 v3(-92526.01,3472.5) ; -92519,4805 -92519,4610.5 -92518.78,4610.29 -92518.78,4590.22 ; v1(-92514,4540) -92518.78,4544.78 -92518.78,4590.22 ; -92504,890 -92504,695.5 -92503.78,695.29 -92503.78,675.22 ; v1(-92499,625) -92503.78,629.78 -92503.78,675.22 ; -92454.01,3330 -92449.25,3334.75 -92449.25,3352.32 -92443.22,3358.35 -92443.22,3365.78 -92404,3405 -92161.42,3405 -92161.42,3342.42 -92149,3330 ; v1(-92329,5845) -92329,5435 -92449,5315 -93708.5,5315 -93729,5335.5 v1(-93729,5430) -94259,5430 ; v1(-92314,1930) -92314,1520 -92434,1400 -93693.5,1400 -93714,1420.5 v1(-93714,1515) -94244,1515 ; -92304,4805 -92518.78,4590.22 ; -92289,890 -92503.78,675.22 ; v1(-92244,-470) -92239.22,-474.78 -92221.54,-474.78 -92216.32,-480 -91265.73,-480 -91250.73,-465 ; -92179.01,7255 -92174.25,7259.75 -92174.25,7277.32 -92168.22,7283.35 -92168.22,7290.78 -92129,7330 -91886.42,7330 -91886.42,7267.42 -91874,7255 ; -92164.01,3340 -92159.25,3344.75 -92159.25,3362.32 -92153.22,3368.35 -92153.22,3375.78 -92114,3415 -91871.42,3415 -91871.42,3352.42 -91859,3340 ; -91834,1070 -91834,1170 ; -91834,3170 -91834,3070 -91734,2970 -91734,2700 ; -91629.04,-315 -93019,-315 ; -91559,4995 -91559,5095 ; -91559,7095 -91559,6995 -91459,6895 -91459,6625 ; -91544,1080 -91544,1180 ; -91544,3180 -91544,3080 -91444,2980 -91444,2710 ; -91444,-315 -91314,-185 -91134,-185 -90994,-325 -90994,-525 -91034,-565 -91034,-649.6 -90973.6,-710 -90704,-710 -90629,-635 -90629,-405 -90689,-345 v1(-90689,-320) ; v1(-91274,1520) -91399,1395 -91399,420 ; -91258.96,-315 -91250.73,-323.23 -91250.73,-465 ; -91099,2085 -91099,1985 -91099,1780 ; -90999,-15 -90999,85 ; -90999,1985 -90999,2085 -90999,2199.5 -91004.5,2205 -91659,2205 v1(-92159,1705) ; -90999,2195 -90864,2330 -89924,2330 ; -90899,1985 -90899,2085 ; v1(-90869,1670) -90239,1040 v1(-89539,1040) ; v1(-90811.5,1737.5) -91056.5,1737.5 -91099,1780 ; v1(-90784,-405) -90788.78,-400.22 -90848.78,-400.22 -90914,-335 ; -90744,-620 -90944,-620 -90944,-592.41 -90914,-562.41 -90914,-335 ; -90563.87,-617.57 -90563.87,-622.13 -90565.43,-623.7 -90565.43,-681.43 -90649,-765 ; -90494,-205 -90709,-205 ; -90476.67,-708.17 -90533.5,-765 -90649,-765 ; -90420,-686.3 -90420,-764 -90409,-775 ; -90370,-686.3 -90370,-736 -90409,-775 ; -90246.57,-330.13 -90309.8,-330.13 -90330.3,-309.63 -90330.3,-290.92 -90346.41,-274.81 -90639.19,-274.81 -90709,-205 ; -89924,2245 -89924,2330 ; -89845,605 -89845,617.9 -89823.8,639.1 -89823.8,646.51 -89562.82,907.5 -89277.82,907.5 -89232.82,862.5 -88711.5,862.5 v1(-88509,1065) -88509,1525 -88599,1615 ; -89815,1380 -89675,1520 -88694,1520 -88599,1615 ; -89759,-205 -89757.28,-205 -89699.86,-147.58 -89402.69,-147.58 -89345.27,-205 -89344,-205 -89344,-295 v1(-89414,-365) -89411.5,-367.5 -89411.5,-577.5 v1(-89409,-580) ; -89724,2245 -89724,2330.45 -89681.01,2373.44 v3(-89681.01,2377.5) ; -89659,-205 -89659,-399.5 -89658.78,-399.71 -89658.78,-419.78 ; v1(-89654,-470) -89658.78,-465.22 -89658.78,-419.78 ; v1(-89469,835) -89469,425 -89589,305 -90848.5,305 -90869,325.5 v1(-90869,420) -91399,420 ; -89444,-205 -89658.78,-419.78 ; -89319.01,2245 -89314.25,2249.75 -89314.25,2267.32 -89308.22,2273.35 -89308.22,2280.78 -89269,2320 -89026.42,2320 -89026.42,2257.42 -89014,2245 ; -88699,-15 -88699,85 ; -88699,2085 -88699,1985 -88599,1885 -88599,1615 ; -96154,770 -96154,1245 ; -96154,770 -95619,235 -93619,235 -93544,310 ; -96154,1245 -96149,1250 -95899,1250 -94314,1250 -94234,1170 -94234,1070 -94159,995 -94054.5,995 -94034,1015.5 -94034,1070 -93844,880 ; -96016.25,2240 -95739,2240 ; -95879,4695 -95879,5170 ; -95879,4695 -95344,4160 -93344,4160 -93269,4235 ; -95879,5170 -95874,5175 -95624,5175 -94039,5175 -93959,5095 -93959,4995 -93884,4920 -93779.5,4920 -93759,4940.5 -93759,4995 -93569,4805 ; -95864,780 -95864,1255 ; -95864,780 -95329,245 -93329,245 -93254,320 ; -95864,1255 -95859,1260 -95609,1260 -94024,1260 -93944,1180 -93944,1080 -93869,1005 -93764.5,1005 -93744,1025.5 -93744,1080 -93554,890 ; -95741.25,6165 -95464,6165 ; -95739,2240 -95494,2240 -94879,2855 -94244,2855 -94234,2865 ; -95726.25,2250 -95449,2250 ; -95464,6165 -95219,6165 -94604,6780 -93969,6780 -93959,6790 ; -95449,2250 -95204,2250 -94589,2865 -93954,2865 -93944,2875 ; -94385.73,620 -94385.73,605 -94385.73,553.09 -94152.64,320 -93784,320 ; -94110.73,4545 -94110.73,4530 -94110.73,4478.09 -93877.64,4245 -93509,4245 ; -94095.73,630 -94095.73,615 -94095.73,563.09 -93862.64,330 -93494,330 ; -93059,3415 -92959,3515 -92169.5,3515 -92149,3494.5 -92149,3405 -92149,3342.42 ; -93019,-315 -93019,160 ; -93019,-315 -92484,-850 -90484,-850 -90409,-775 ; -93019,160 -93014,165 -92764,165 -91179,165 -91099,85 -91099,-15 -91024,-90 -90919.5,-90 -90899,-69.5 -90899,-15 -90709,-205 ; -92881.25,1155 -92604,1155 ; -92784,7340 -92684,7440 -91894.5,7440 -91874,7419.5 -91874,7330 -91874,7267.42 ; -92769,3425 -92669,3525 -91879.5,3525 -91859,3504.5 -91859,3415 -91859,3352.42 ; -92604,1155 -92359,1155 -91744,1770 -91109,1770 -91099,1780 ; -92149,3330 -92149,3342.42 ; -92149,3330 -92149,3342.42 ; -91874,7255 -91874,7267.42 ; -91874,7255 -91874,7267.42 ; -91859,3340 -91859,3352.42 ; -91859,3340 -91859,3352.42 ; -91250.73,-465 -91250.73,-480 -91250.73,-531.91 -91017.64,-765 -90649,-765 ; -89924,2330 -89824,2430 -89034.5,2430 -89014,2409.5 -89014,2320 -89014,2257.42 ; -89014,2245 -89014,2257.42 ; -89014,2245 -89014,2257.42

## Text inside footprints (layer, text, board x,y; h text height)
P1: Top Overlay "50" at -91464,1160 h50; Top Overlay "49" at -91464,1060 h50; Top Overlay "1" at -94044,1060 h50; Top Overlay "2" at -94044,1160 h50
P1_1: Top Overlay "50" at -91754,1150 h50; Top Overlay "49" at -91754,1050 h50; Top Overlay "1" at -94334,1050 h50; Top Overlay "2" at -94334,1150 h50
P1_2: Top Overlay "50" at -88619,65 h50; Top Overlay "49" at -88619,-35 h50; Top Overlay "1" at -91199,-35 h50; Top Overlay "2" at -91199,65 h50
P1_3: Top Overlay "50" at -91479,5075 h50; Top Overlay "49" at -91479,4975 h50; Top Overlay "1" at -94059,4975 h50; Top Overlay "2" at -94059,5075 h50
P2: Top Overlay "50" at -91464,3160 h50; Top Overlay "49" at -91464,3060 h50; Top Overlay "1" at -94044,3060 h50; Top Overlay "2" at -94044,3160 h50
P2_1: Top Overlay "50" at -91754,3150 h50; Top Overlay "49" at -91754,3050 h50; Top Overlay "1" at -94334,3050 h50; Top Overlay "2" at -94334,3150 h50
P2_2: Top Overlay "50" at -88619,2065 h50; Top Overlay "49" at -88619,1965 h50; Top Overlay "1" at -91199,1965 h50; Top Overlay "2" at -91199,2065 h50
P2_3: Top Overlay "50" at -91479,7075 h50; Top Overlay "49" at -91479,6975 h50; Top Overlay "1" at -94059,6975 h50; Top Overlay "2" at -94059,7075 h50